# Altium PCB CZ201C_Weld_V2.0.PcbDoc
Units mm, origin at the board's own origin, x right, y up, seen from the top; angles counter-clockwise.
Board outline 73 x 60 mm, 2 copper layers (Top Layer, Bottom Layer); 64 components, 36 nets, 198 pads, 0 vias.
Unrouted connection lines stored in the file: 84.
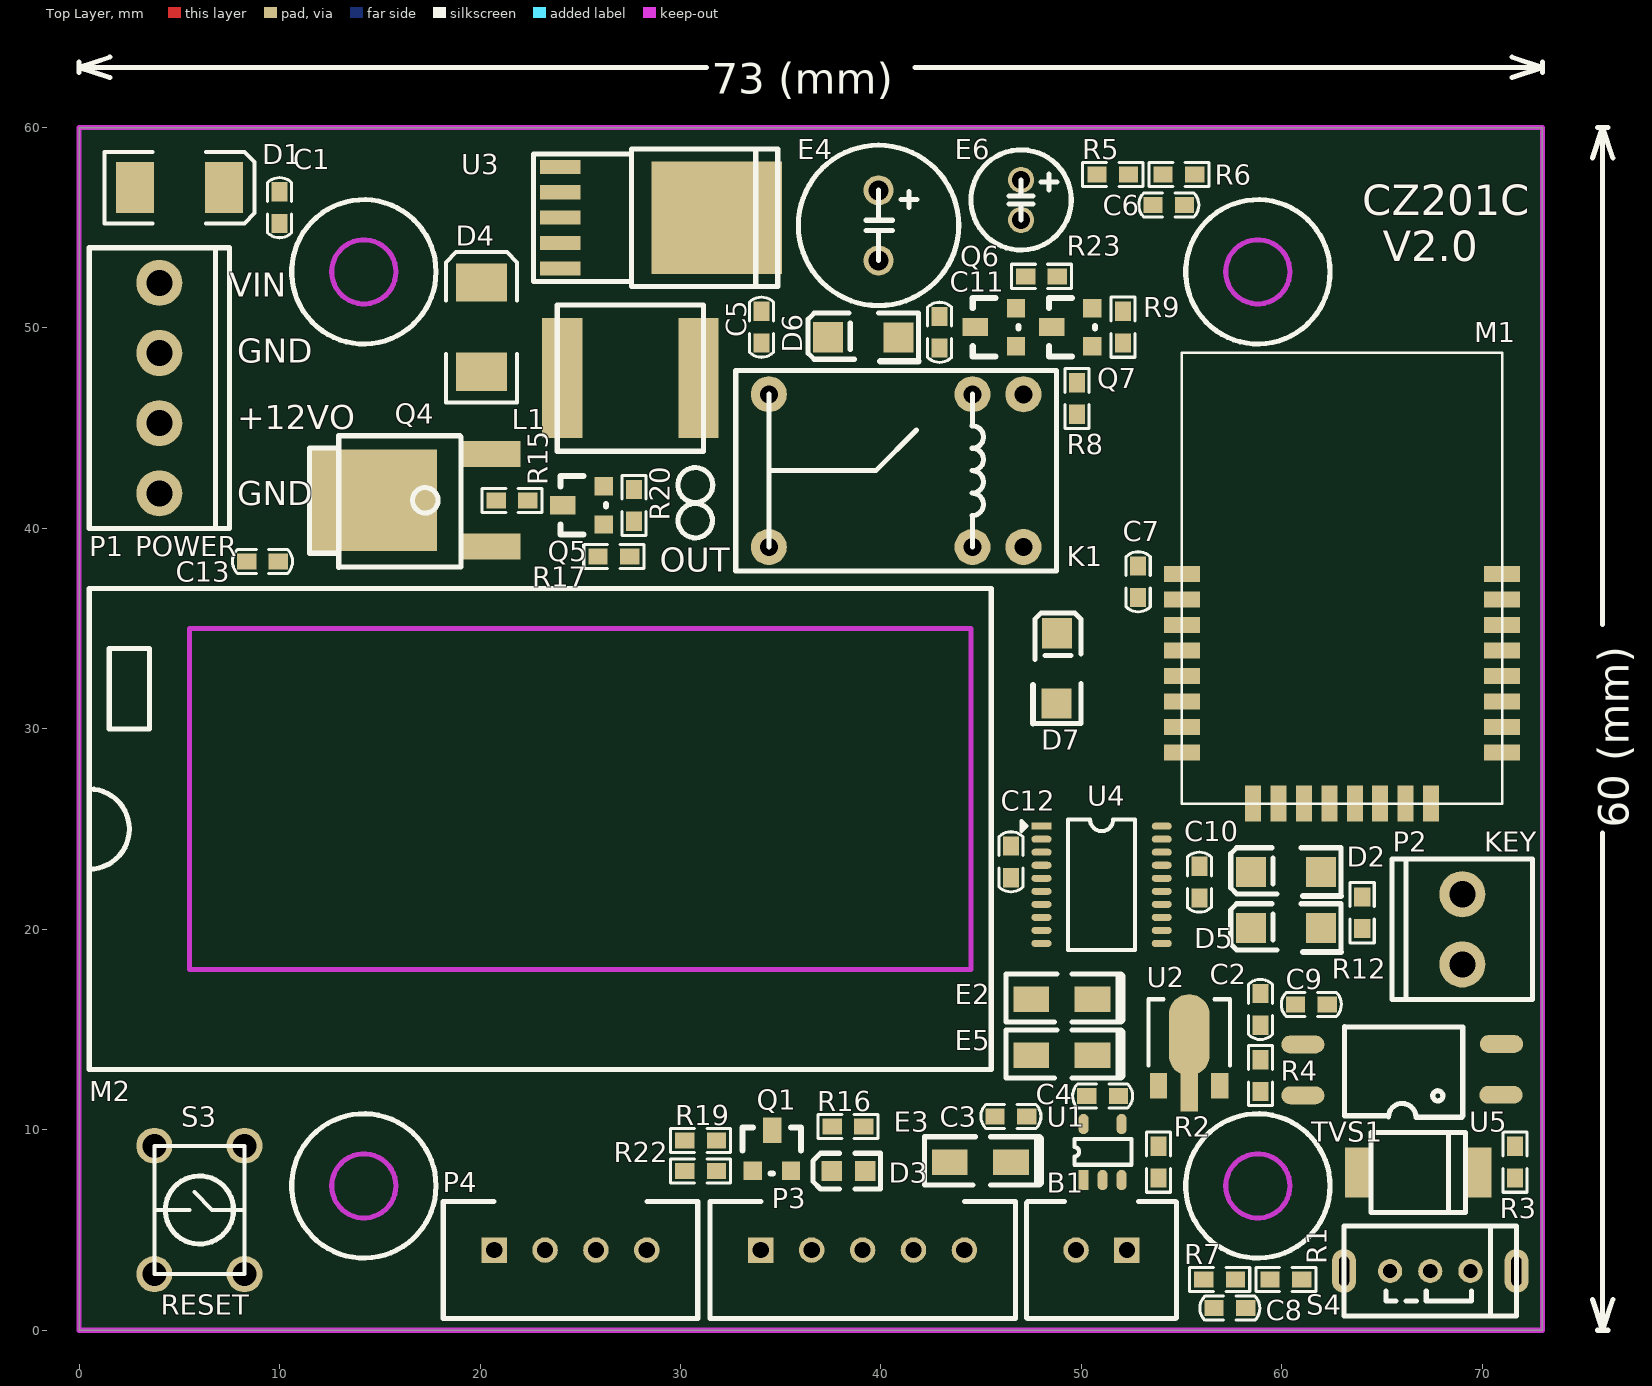
[diagram p0: Top Layer view]
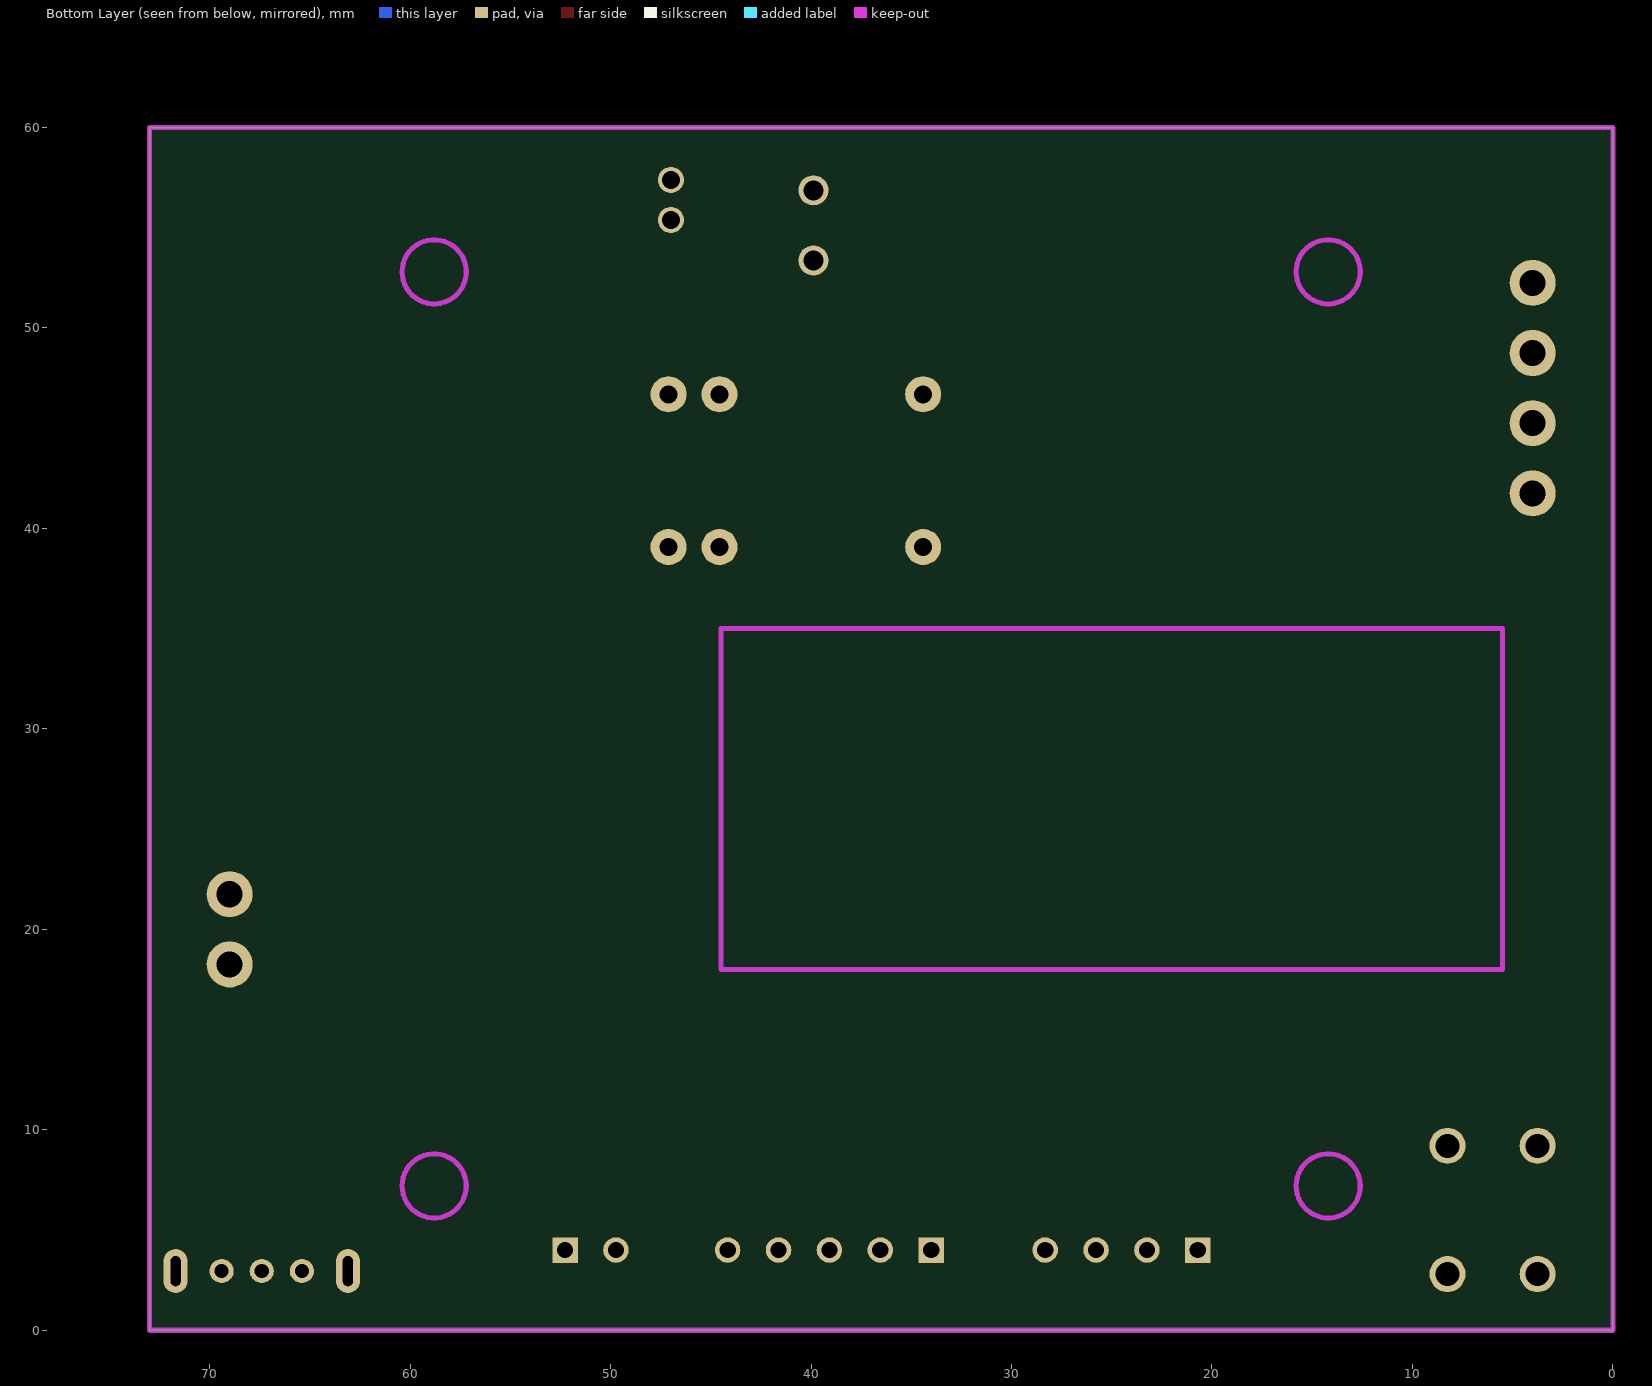
[diagram p1: Bottom Layer view, seen from below]

## Layer stack, top to bottom
Top Layer: signal copper 0.0356
Dielectric: dielectric 0.32, FR-4, Dk 4.8
Bottom Layer: signal copper 0.0356

## Board outline
0,0 73,0 73,60 0,60

## Design rules (kind name [scope] priority, off if disabled: settings)
Clearance "InPoygon to Keep-Out Layer" [InPolygon vs OnLayer('Keep-Out Layer')] p1: gap=1
Clearance "GND to Keep-Out Layer" [InNet('GND') vs OnLayer('Keep-Out Layer')] p2: gap=0.5
Clearance "GND to InPoygon" [InNet('GND') vs InPolygon] p3: gap=1
Clearance "Power Class" [InNetClass('Power Class')] p4: gap=0.5
Clearance "InPoygon to All" [InPolygon] p5: gap=0.5
Clearance [All] p6: gap=0.254
MinimumSolderMaskSliver [All] p1: minsoldermaskwidth=0
PlaneConnect [All] p1: planeconnectstyle=Relief reliefexpansion=0.508 reliefentries=4 reliefconductorwidth=0.508 reliefairgap=0.508
PolygonConnect IsVia [IsVia] p1: connectstyle=Direct reliefconductorwidth=0.254 reliefentries=4 polygonreliefangle="90 Angle"
PolygonConnect IsSMDPad [InSMTComponent] p2: connectstyle=Direct reliefconductorwidth=0.254 reliefentries=4 polygonreliefangle="90 Angle"
PolygonConnect [All] p3: connectstyle=Relief reliefconductorwidth=0.762 reliefentries=4 polygonreliefangle="90 Angle"
RoutingVias [All] p1: holewidth=0.711 width=1.27 viastyle="Through Hole" minholewidth=0.508 minwidth=1.016 maxholewidth=0.711 maxwidth=1.27
SilkToSilkClearance [All] p1: silktosilkclearance=0
SilkscreenOverComponentPads [All] p1: minsilkscreentomaskgap=0
SolderMaskExpansion [All] p1: expansion=0.102
Width [All] p1: maxlimit=25.4 minlimit=0.254 preferedwidth=0.254
24 further rules are at their usual default settings.

## Classes and differential pairs
net class "Power Class": +3.3V +5V +12V +12V_OUT +BAT +BAT_OUT +VIN

## Components (designator, comment, footprint, x,y, rotation, side; value= is the part's Value field where it differs from the comment)
B1 "3.7V" XH2.54-2P-BAT 51,4 r0 top locked
C1 "100nF" 0603_CN 10,56 r270 top
C2 "100nF" 0603_CN 58.928,16.002 r90 top
C3 "100nF" 0603_CN 46.482,10.668 r180 top
C4 "100nF" 0603_CN 51.054,11.684 r180 top
C5 "100nF" 0603_CN 34.036,50.038 r270 top
C6 "100nF" 0603_CN 54.356,56.134 r0 top
C7 "100nF" 0603_CN 52.832,37.338 r270 top
C8 "100nF" 0603_CN 57.404,1.1 r180 top
C9 "100nF" 0603_CN 61.468,16.256 r180 top
C10 "100nF" 0603_CN 55.88,22.352 r270 top
C11 "100nF" 0603_CN 42.926,49.784 r90 top
C12 "100nF" 0603_CN 46.482,23.368 r90 top
C13 "100nF" 0603_CN 9.144,38.354 r180 top
D1 "SS14" DO-214AC(SMA) 5,57 r180 top
D2 "1N4148" LL-34 60.198,22.86 r0 top
D3 "Red" 0603_LED 38.378,7.94 r0 top
D4 "SS14" DO-214AC(SMA) 20.066,50.038 r270 top
D5 "1N4148" LL-34 60.198,20.066 r0 top
D6 "1N4148" LL-34 39.116,49.53 r0 top
D7 "1N4148" LL-34 48.768,33.02 r270 top
E2 "10uF/6.3V" 3216_E 49.022,16.51 r180 top
E3 "10uF/6.3V" 3216_E 44.958,8.382 r180 top
E4 "470uF/16V" CS_470uF/16V 39.878,55.118 r270 top
E5 "10uF/6.3V" 3216_E 49.022,13.716 r180 top
E6 "100uF/16V" CS_100uF/16V 46.99,56.388 r270 top
K1 "HK4100F-DC3V-SHG" HK4100-DC5V-SHG 40.5,42.5 r270 top
L1 "33uH/1A" CDRH74 27.5,47.5 r0 top
M1 "E18-MS1PA2-IPX" E18-MS1PA2-IPX 63,32 r90 top locked
M2 "RF-CHJ-7787Z" RF-CHJ-7787Z 0.5,13 r0 top locked
P1 "POWER" KF3.5-4P 4,47 r270 top locked
P2 "KEY" KF3.5-2P 69,20 r90 top locked
P3 "SWD" XH2.54-5P 34,4 r0 top locked
P4 "ISP" XH2.54-4P 20.7,4 r0 top locked
Q1 "S8050" SOT-23 34.556,8.964 r0 top
Q4 "NCE01P13K" TO-252 17.272,41.402 r90 top
Q5 "S8050" SOT-23 25.146,41.148 r90 top
Q6 "SI2301DS" SOT-23 45.72,50.038 r90 top
Q7 "S8050" SOT-23 49.53,50.038 r90 top
R1 "1M" 0603_RN 60.198,2.54 r0 top
R2 "1.65K" 0603_RN 53.848,8.382 r270 top
R3 "1K" 0603_RN 71.628,8.382 r270 top
R4 "100K" 0603_RN 58.928,12.7 r90 top
R5 "10K" 0603_RN 51.562,57.658 r180 top
R6 "20K" 0603_RN 54.864,57.658 r180 top
R7 "1M" 0603_RN 56.896,2.54 r0 top
R8 "10K" 0603_RN 49.784,46.482 r270 top
R9 "100K" 0603_RN 52.07,50.038 r270 top
R12 "100K" 0603_RN 64.008,20.828 r270 top
R15 "100K" 0603_RN 21.59,41.402 r180 top
R16 "1K" 0603_RN 38.354,10.16 r0 top
R17 "10K" 0603_RN 26.67,38.608 r180 top
R19 "10K" 0603_RN 31,9.472 r180 top
R20 "100K" 0603_RN 27.686,41.148 r270 top
R22 "100K" 0603_RN 31,7.948 r0 top
R23 "100K" 0603_RN 48.006,52.578 r180 top
S3 "RESET" KEY-6*6MM-DIP 6,6 r270 top locked
S4 "SS12D07VG3" SS-12D07G3 67.4,3 r180 top locked
TVS1 "SMBJ6.8CA" DO-214AA(SMB) 66.802,7.874 r180 top
U1 "TP4054" SOT-23-5 51.054,8.89 r90 top
U2 "HT7333-A" SOT-89 55.372,12.192 r0 top
U3 "XL1507-5.0E1" TO-252-5 24,55.5 r270 top
U4 "STM32F030F4P6" TSSOP20 48.006,25.146 r0 top
U5 "PC817" SOP-4 66,13 r180 top

## Footprints (in the part's own frame and the unit in brackets; to place one, negate y for a bottom-side part, rotate by r counter-clockwise, add the part's x,y. Pads: shape width x height; smd on the part's side, far side on the other; paste and mask are expansions set on the pad)
0603_CN [mm] "SMD Resistor"
  rect 0.96x0.8 smd: 1(-0.79,0) 2(0.79,0)
  silkscreen extent -1.5,-0.6 1.5,0.6
0603_LED [mil] "SMD LED"
  rect 40x40 smd: A(33,0) K(-33,0)
  silkscreen extent -70,-35 63,35
0603_RN [mm] "SMD Resistor"
  rect 0.96x0.8 smd: 1(-0.79,0) 2(0.79,0)
  silkscreen extent -1.5,-0.6 1.5,0.6
3216_E [mm] "SMD Tantalum Capacitor"
  rect 1.78x1.27 smd: 1(-1.525,0) 2(1.525,0)
  silkscreen extent -2.92,-1.27 2.79,1.14
CDRH74 [mm]
  rect 2x6 smd: 1(-3.4,0) 2(3.4,0)
  silkscreen extent -3.65,-3.65 3.65,3.65
CS_100uF/16V [mm] "PTH  Electrolytic  Capacitor"
  round 1.3 hole 0.9: 1(-1,0) 2(1,0)
  silkscreen extent -2.5,-2.5 2.5,2.5
CS_470uF/16V [mm] "PTH  Electrolytic  Capacitor"
  round 1.5 hole 1: 1(-1.75,0) 2(1.75,0)
  silkscreen extent -4,-4 4,4
DO-214AA(SMB) [mm] "SMD Diode"
  rect 1.2x2.5 smd: A(3.05,0) K(-3.05,0)
  silkscreen extent -2.35,-2 2.35,2
DO-214AC(SMA) [mil] "SMD Diode"
  rect 75x100 smd: A(87.5,0) K(-87.5,0)
  silkscreen extent -147,-70 148,70
E18-MS1PA2-IPX [mm] "22.5mm*16mm*2.40mm-S"
  rect 0.8x1.8 smd: 1(5.716,7.987) 2(4.446,7.987) 3(3.176,7.987) 4(1.906,7.987) 5(0.636,7.987) 6(-0.634,7.987) 7(-1.904,7.987) 8(-3.174,7.987) 17(-3.174,-7.987) 18(-1.904,-7.987) 19(-0.634,-7.987) 20(0.636,-7.987) 21(1.906,-7.987) 22(3.176,-7.987) 23(4.446,-7.987) 24(5.716,-7.987)
  rect 1.8x0.8 smd: 9(-5.716,4.445) 10(-5.716,3.175) 11(-5.716,1.905) 12(-5.716,0.635) 13(-5.716,-0.635) 14(-5.716,-1.905) 15(-5.716,-3.175) 16(-5.716,-4.445)
  silkscreen extent -5.73,-8 16.77,8
HK4100-DC5V-SHG [mm]
  round 1.8 hole 0.9: 1(-4.191,-6.096) 1(3.429,-6.096) 2(-4.191,6.604) 3(3.429,6.604) 4(3.429,4.064) 5(-4.191,4.064)
  silkscreen extent -5.38,-7.75 4.62,8.25
KEY-6*6MM-DIP [mm]
  round 1.8 hole 1.2: 1(-3.2,2.25) 2(-3.2,-2.25) 3(3.2,-2.25) 4(3.2,2.25)
  silkscreen extent -3.2,-2.25 3.2,2.25
KF3.5-2P [mm]
  round 2.3 hole 1.3: 1(-1.75,0) 2(1.75,0)
  silkscreen extent -3.5,-3.5 3.5,3.5
KF3.5-4P [mm]
  round 2.3 hole 1.3: 1(-5.25,0) 2(-1.75,0) 3(1.75,0) 4(5.25,0)
  silkscreen extent -7,-3.5 7,3.5
LL-34 [mm] "SMD Diode"
  rect 1.5x1.5 smd: A(1.75,-0.008) K(-1.75,0.008)
  silkscreen extent -2.75,-1.19 2.75,1.21
RF-CHJ-7787Z [mm]
  Keep-Out Layer lines w0.254: 5,5 5,22 44,22 44,5 5,5
  silkscreen extent 0,0 45,24
SOP-4 [mil]
  oval 85x35 smd: 1(-194,49.5) 2(-195,-50.5) 3(195,-49.5) 4(195,50.5)
  silkscreen extent -119,-85 113,94
SOT-23 [mil] "SMD Triode Or Diode"
  rect 36x36 smd: 1(-37.5,-40) 2(37.5,-40)
  rect 36x50 smd: 3(0.5,40)
  silkscreen extent -58,-45 58,45
SOT-23-5 [mil]
  rect 40x20 smd: 1(-55,37.4)
  oval 40x20 smd: 2(-55,0) 3(-55,-37.4) 4(55,-37.4) 5(55,37.4)
  silkscreen extent -25,-57 26,55
SOT-89 [mil] "SMD Diode"
  rect 34x50 smd: 1(-60,0) 3(60,0)
  rect 34x100 smd: 2(0,0)
  oval 80x160 smd: 2(0,100)
  silkscreen extent -80,40 80,170
SS-12D07G3 [mm]
  oval 1.2x2.2 hole 0.5 slot 1.5 at 90 deg: 0(-4.3,0.05) 0(4.3,0.05)
  round 1.2 hole 0.7: 1(-2,0.05) 2(0,0.05) 3(2,0.05)
  silkscreen extent -4.3,-2.2 4.3,2.3
TO-252 [mm] "SMD IC"
  rect 1.3x3 smd: 1(-2.3,-3.245) 3(2.3,-3.245)
  rect 5.08x6.35 smd: 2(0,2.592)
  silkscreen extent -3.35,-1.78 3.22,5.79
TO-252-5 [mm] "SMD IC"
  rect 5.6x6.5 smd: 0(0,7.802)
  rect 0.7x2 smd: 1(-2.54,0) 2(-1.27,0) 3(0,0) 4(1.27,0) 5(2.54,0)
  silkscreen extent -3.42,-1.34 3.42,10.85
TSSOP20 [mm]
  rect 1x0.35 smd: 1(0,0)
  oval 1x0.35 smd: 2(0,-0.65) 3(0,-1.3) 4(0,-1.95) 5(0,-2.6) 6(0,-3.25) 7(0,-3.9) 8(0,-4.55) 9(0,-5.2) 10(0,-5.85) 11(6,-5.85) 12(6,-5.2) 13(6,-4.55) 14(6,-3.9) 15(6,-3.25) 16(6,-2.6) 17(6,-1.95) 18(6,-1.3) 19(6,-0.65) 20(6,0)
  silkscreen extent -1,-6.17 4.67,0.33
XH2.54-2P-BAT [mil]
  rect 50x50 hole 32: 1(50,0)
  round 50 hole 32: 2(-50,0)
  silkscreen extent -148,-135 148,95
XH2.54-4P [mil]
  rect 50x50 hole 32: 1(0,0)
  round 50 hole 32: 2(100,0) 3(200,0) 4(300,0)
  silkscreen extent -100,-135 400,95
XH2.54-5P [mil]
  rect 50x50 hole 32: 1(0,0)
  round 50 hole 32: 2(100,0) 3(200,0) 4(300,0) 5(400,0)
  silkscreen extent -100,-135 500,95

## Part data
B1: library part BATTERY
C1 C2 C3 C4 C5 C6 C7 C8 C9 C10 C11 C12 C13: library part Cap1
D1 D4: library part Diode-A
D2 D5 D6 D7: library part Diode-B
D3: library part LED
E2 E3 E5: library part "Cap Ta"
E4 E6: library part "Cap Pol1"
K1: library part HK4100F-DC5V-SHG, "HK4100-DC5V-SHG,HRS1H-S-DC5V"
L1: library part Inductor
P1: library part "Header 4", "Header, 4-Pin"
P2: library part "Header 2", "Header, 2-Pin"
P4: library part ISP_UART
Q1 Q5 Q7: library part 8050
Q4: library part PMOS-2, "P-Channel Power MOSFET"
Q6: library part "MOSFET P"
R1 R2 R3 R4 R5 R6 R7 R8 R9 R12 R15 R16 R17 R19 R20 R22 R23: library part Res1
S3: library part SW-4
S4: library part SS-12D07G3
TVS1: library part Diode-C
U1: library part QX4054, "TP4054,LTC4054 ,PJ4054MR"
U2: library part HT7833, "HT7533; Output 500mA; Iq: 5uA, max= 7uA"
U3: library part XL1507

## Nets (pads, with @x,y where several pads share a name; then routed paths per layer and width w, separated by ;. In a path a pad name is that pad's centre, name@x,y a point inside that pad or via, vN(x,y) a via of type N, cw(c..) or ccw(c..) an arc to the next point about the centre after c; other vN are vias at no path point)
+3.3V: C3.1 C7.2 C10.1 C12.1 D3.A E3.1 M1.2 P3.1 P4.1 Q6.2 R3.2 R4.2 R12.2 R23.2 U2.3 U4.5 U4.16
+5V: C4.1 C5.1 E4.1 E5.1 E6.1 L1.2 R5.2 U1.4 U3.4
+12V: C1.1 D1.K Q4.3 R15.2 U3.1
+12V_OUT: C13.1 P1.3 Q4.2
+BAT: B1.1 S4.2 U1.3
+BAT_OUT: C2.1 E2.1 R1.2 S4.3 U2.2
+VIN: D1.A P1.1
BAT_VOL: C8.1 R1.1 R7.2 U4.7
E18_UART_RX: D2.K M1.10
GND: B1.2 C1.2 C2.2 C3.2 C4.2 C5.2 C6.2 C7.1 C8.2 C9.2 C10.2 C11.2 C12.2 C13.2 D4.A D7.A E2.2 E3.2 E4.2 E5.2 E6.2 K1.5 M1.1 M1.7 P1.2 P1.4 P2.2 P3.3 P4.4 Q1.2 Q5.2 Q7.2 R2.1 R6.1 R7.1 R9.1 R20.1 R22.1 S3.2 S3.3 TVS1.A U1.2 U2.1 U3.0 U3.3 U3.5 U4.1 U4.15 U5.3
ISP_UART_RX: D5.K P4.3
LED1: R19.2 U4.10
LIGHT_CTR: R17.1 U4.13
LOCK_CTR: R8.2 U4.17
LOCK_KEY: R4.1 U4.11 U5.4
LOCK_KEY_IN: C9.1 P2.1 TVS1.K U5.2
NetC11_1: C11.1 D6.A Q6.3
NetD3_K: D3.K R16.2
NetD4_K: D4.K L1.1 U3.2
NetD6_K: D6.K D7.K K1.4
NetQ1_1: Q1.1 R19.1 R22.2
NetQ1_3: Q1.3 R16.1
NetQ4_1: Q4.1 Q5.3 R15.1
NetQ5_1: Q5.1 R17.2 R20.2
NetQ6_1: Q6.1 Q7.3 R23.1
NetQ7_1: Q7.1 R8.1 R9.2
NetR2_2: R2.2 U1.5
NetR3_1: R3.1 U5.1
NRST: P3.5 S3.1 S3.4 U4.4
PWR_STATE: C6.1 R5.1 R6.2 U4.18
RF_KEY_IN: K1.1
RF_KEY_OUT: K1.3
SWCLK: P3.2 U4.20
SWDIO: P3.4 U4.19
UART_RX: D2.A D5.A R12.1 U4.9
UART_TX: M1.11 P4.2 U4.8
pads on no net: K1.2 M1.3 M1.4 M1.5 M1.6 M1.8 M1.9 M1.12 M1.13 M1.14 M1.15 M1.16 M1.17 M1.18 M1.19 M1.20 M1.21 M1.22 M1.23 M1.24 S4.0 S4.1 U1.1 U4.2 U4.3 U4.6 U4.12 U4.14

## Keep-outs
Keep-Out Layer:
  circle w0.254: c14.2,52.8 r1.6
  circle w0.254: c58.8,52.8 r1.6
  circle w0.254: c14.2,7.2 r1.6
  circle w0.254: c58.8,7.2 r1.6
  lines w0.254: 0,0 0,60 73,60 73,0 0,0

## Other copper
Multi-Layer:
  pour cut-out: 55,60 73,60 73,26 55,26
  pour cut-out: 55.2,7.2 ccw(c58.8,7.2) 58.8,3.6 ccw(c58.8,7.2) 62.4,7.2 ccw(c58.8,7.2) 58.8,10.8 ccw(c58.8,7.2)
  pour cut-out: 10.6,7.2 ccw(c14.2,7.2) 14.2,3.6 ccw(c14.2,7.2) 17.8,7.2 ccw(c14.2,7.2) 14.2,10.8 ccw(c14.2,7.2)
  pour cut-out: 55.2,52.8 ccw(c58.8,52.8) 58.8,49.2 ccw(c58.8,52.8) 62.4,52.8 ccw(c58.8,52.8) 58.8,56.4 ccw(c58.8,52.8)
  pour cut-out: 14.2,49.2 cw(c14.2,52.8) 10.6,52.8 cw(c14.2,52.8) 14.2,56.4 cw(c14.2,52.8) 17.8,52.8 cw(c14.2,52.8)

## Silkscreen, mask and mechanical layers (free items; w line width, h text height)
Top Overlay:
  circle w0.254: c30.734,40.386 r0.858
  circle w0.254: c30.734,42.164 r0.871
  circle w0.254: c58.8,7.2 r3.6
  circle w0.254: c14.2,7.2 r3.6
  circle w0.254: c58.8,52.8 r3.6
  circle w0.254: c14.2,52.8 r3.6
  lines w0.254: 0,62.746 0,63.254 ; 1.524,62.492 0,63 ; 1.524,63.508 0,63 ; 31.301,63 0,63 ; 41.699,63 73,63 ; 71.476,62.492 73,63 ; 71.476,63.508 73,63 ; 73,62.746 73,63.254 ; 75.492,1.524 76,0 ; 75.492,58.476 76,60 ; 75.746,0 76.254,0 ; 75.746,60 76.254,60 ; 76,24.801 76,0 ; 76,35.199 76,60 ; 76.508,1.524 76,0 ; 76.508,58.476 76,60
  text "73 (mm)" at 31.555,61.687 h1.52
  text "CZ201C" at 64.008,55.626 h1.52
  text "V2.0" at 65.024,53.34 h1.52
  text "VIN" at 7.5,51.562 h1.2
  text "GND" at 7.874,48.26 h1.2
  text "+12VO" at 7.874,44.958 h1.2
  text "GND" at 7.874,41.148 h1.2
  text "OUT" at 28.956,37.846 h1.2
  text "60 (mm)" at 77.313,25.055 h1.52 r90